# EAGLE board fira_nrf_3 (EAGLE 9.1.3)
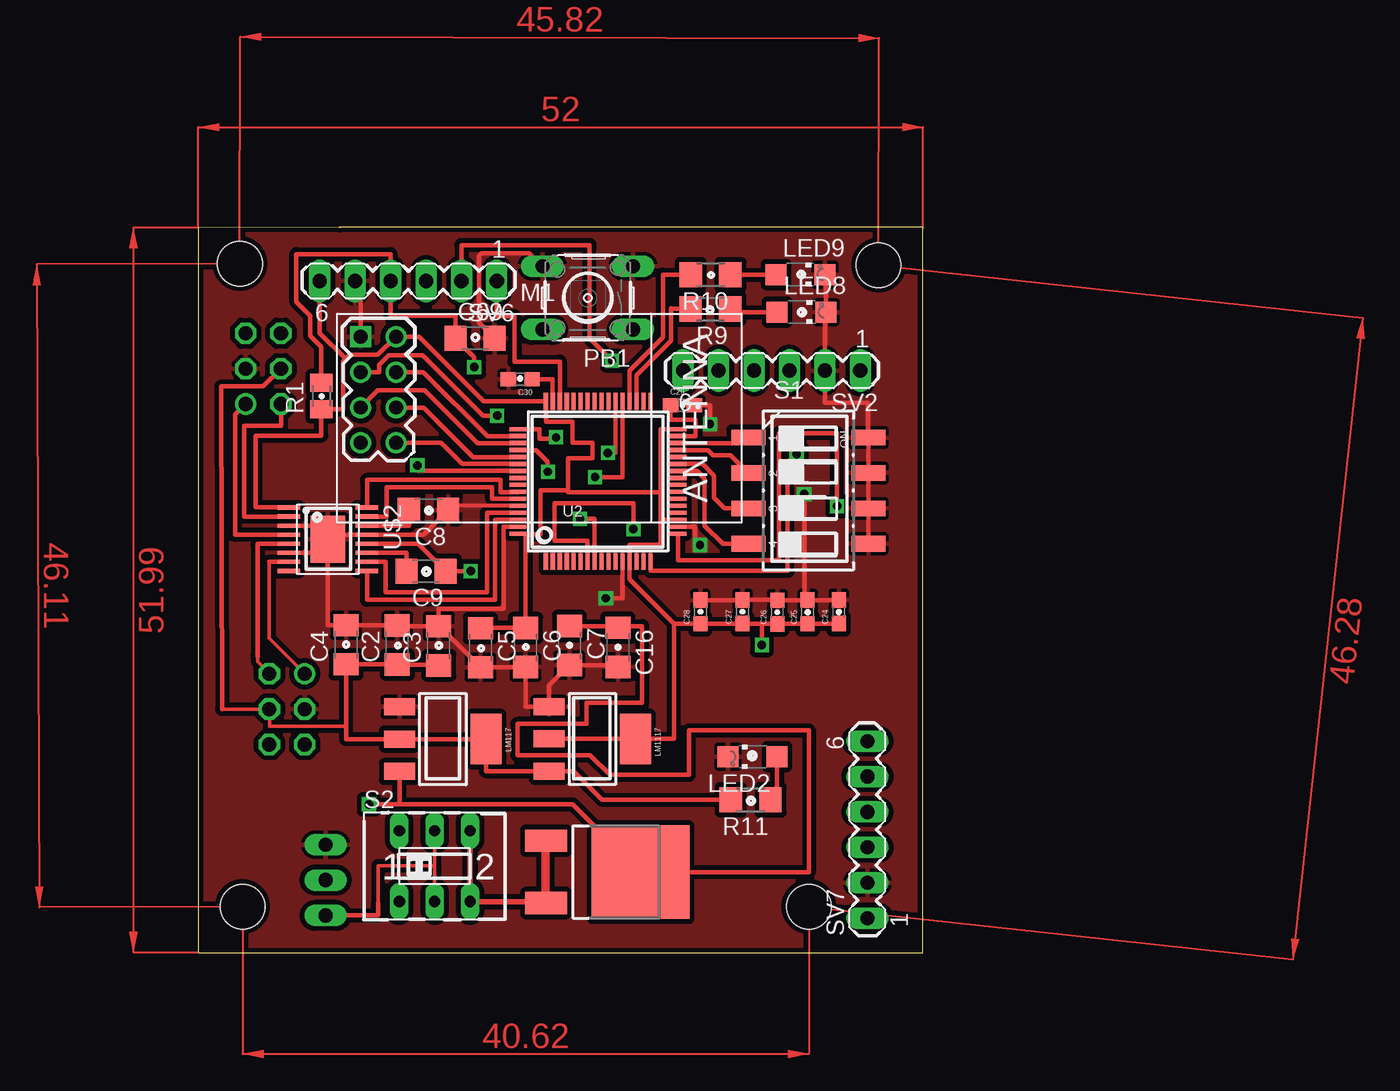
[diagram p0: board, top side]
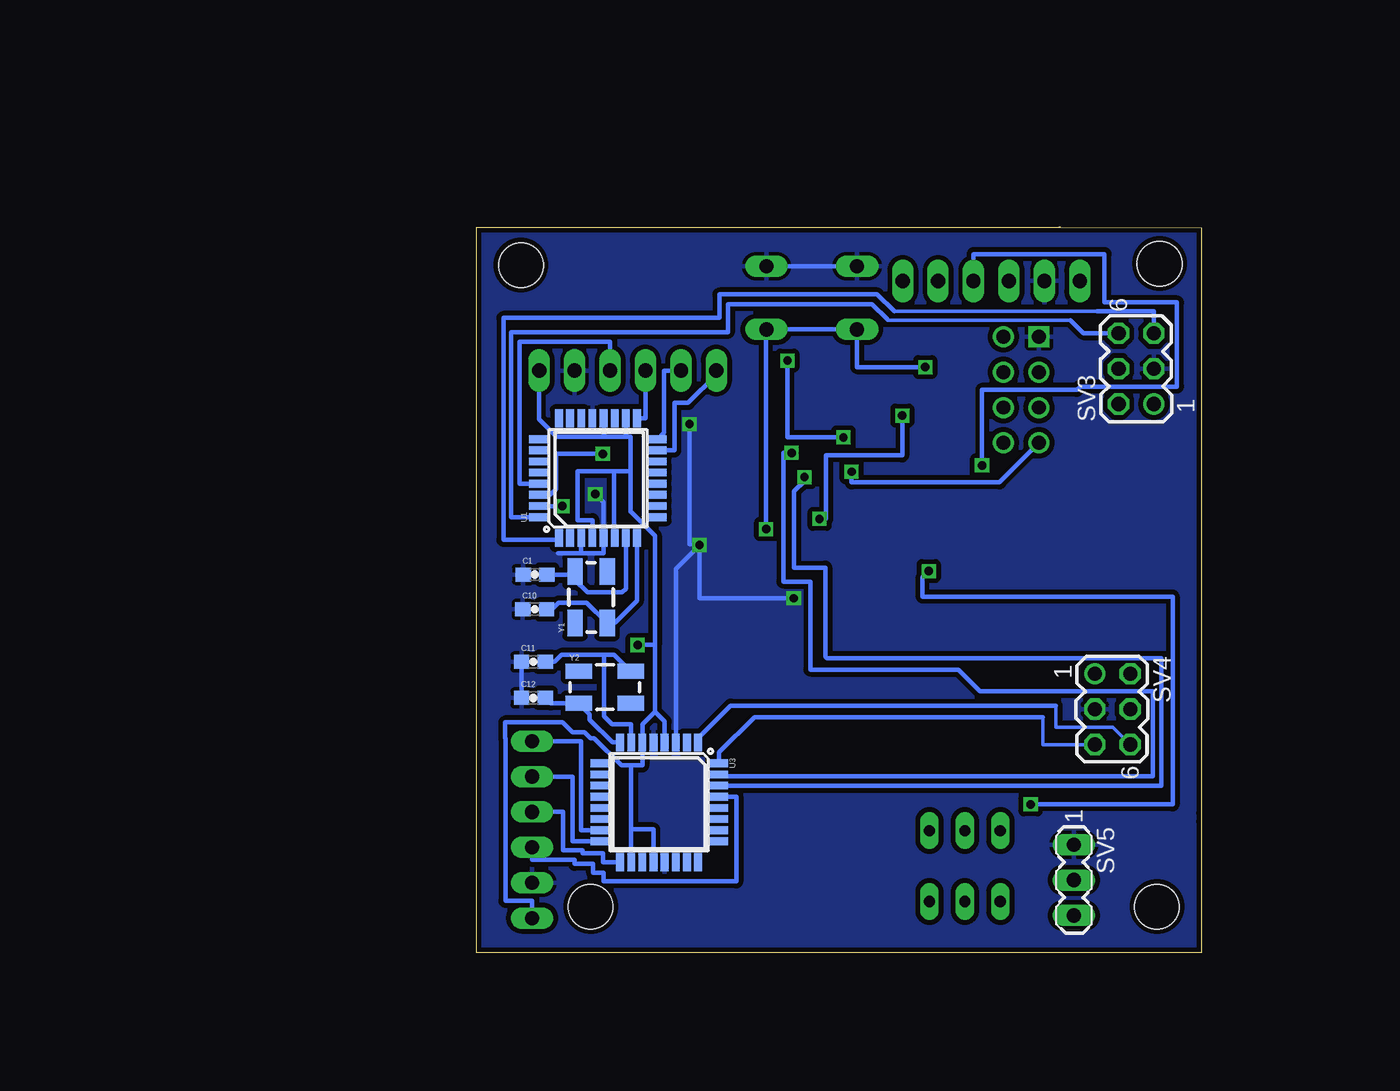
[diagram p1: board, bottom side, seen from below]

Size 52 x 52 mm. Coordinates in mm from the lower left corner, seen from the top.
Outline: 0,0 51.99,0 52,51.61 52,52 10.1,52 10.2,52 0,51.99 0,10 0,9.4 0,0
Copper layers (1*16): Top 0.035mm / dielectric 1.5mm / Bottom 0.035mm
Design rules "default *": minimum track width 10mil, minimum drill 24mil, track to track 7mil, track to pad 7mil, pad to pad 7mil, via to via 7mil, smd to smd 7mil, copper to edge 7mil, drill to drill 7mil, minimum pad ring 10mil, minimum via ring 8mil, stop-mask expansion 0mil, vias tented up to drill 0mil, thermal gap 10mil
Holes 3.2 mm at 43.8,3.29 3.18,3.29 2.99,49.4 48.81,49.3

## Footprints (pad centres in the part's own frame; a part is rotated, then mirrored left to right if it is on the bottom)
0603-CAP = smd 1.1 x 1: 1 -0.85,0; 2 0.85,0
C1206 = smd 1.6 x 1.8: 1 -1.4,0; 2 1.4,0
CHIPLED_1206 = smd 1.5 x 1.5: A 0,-1.75; C 0,1.75
SOT223 = smd 1.219 x 2.235: 1 -2.311,-3.099; 2 0,-3.099; 3 2.311,-3.099 | smd 3.6 x 2.2: 4 0,3.099
WIRELESS-NRF24L01 = drill 1 square: 1 -12.7,6.35 | drill 1: 2 -10.16,6.35; 3 -12.7,3.81; 4 -10.16,3.81; 5 -12.7,1.27; 6 -10.16,1.27; 7 -12.7,-1.27; 8 -10.16,-1.27
B3F-10XX = drill 1.016 long: 1 -3.251,2.261; 2 3.251,2.261; 3 -3.251,-2.261; 4 3.251,-2.261
M0805 = smd 1.3 x 1.6: 1 -0.95,0; 2 0.95,0
R1206 = smd 1.6 x 1.803: 1 -1.422,0; 2 1.422,0
CTS-219-04 = smd 1.13 x 2.44: 1 -3.81,-4.3; 2 -1.27,-4.3; 3 1.27,-4.3; 4 3.81,-4.3; 5 3.81,4.3; 6 1.27,4.3; 7 -1.27,4.3; 8 -3.81,4.3
A68-A31 = drill 0.813 long: 1 -2.54,-2.54; 2 0,-2.54; 3 2.54,-2.54; 4 -2.54,2.54; 5 0,2.54; 6 2.54,2.54
MA06-1 = drill 1.016 long: 1 -6.35,0; 2 -3.81,0; 3 -1.27,0; 4 1.27,0; 5 3.81,0; 6 6.35,0
MA03-2 = drill 1.016: 1 -2.54,-1.27 | drill 1.016 octagon: 2 -2.54,1.27; 3 0,-1.27; 4 0,1.27; 5 2.54,-1.27; 6 2.54,1.27
MA03-1 = drill 1.016 long: 1 -2.54,0; 2 0,0; 3 2.54,0
TQFP32-08 = smd 1.27 x 0.559: 1 -4.293,2.8; 2 -4.293,2; 3 -4.293,1.2; 4 -4.293,0.4; 5 -4.293,-0.4; 6 -4.293,-1.2; 7 -4.293,-2; 8 -4.293,-2.8; 17 4.293,-2.8; 18 4.293,-2; 19 4.293,-1.2; 20 4.293,-0.4; 21 4.293,0.4; 22 4.293,1.2; 23 4.293,2; 24 4.293,2.8 | smd 0.559 x 1.27: 9 -2.8,-4.293; 10 -2,-4.293; 11 -1.2,-4.293; 12 -0.4,-4.293; 13 0.4,-4.293; 14 1.2,-4.293; 15 2,-4.293; 16 2.8,-4.293; 25 2.8,4.293; 26 2,4.293; 27 1.2,4.293; 28 0.4,4.293; 29 -0.4,4.293; 30 -1.2,4.293; 31 -2,4.293; 32 -2.8,4.293
LQFP64 = smd 0.3 x 1.2: 1 -3.75,-5.75; 2 -3.25,-5.75; 3 -2.75,-5.75; 4 -2.25,-5.75; 5 -1.75,-5.75; 6 -1.25,-5.75; 7 -0.75,-5.75; 8 -0.25,-5.75; 9 0.25,-5.75; 10 0.75,-5.75; 11 1.25,-5.75; 12 1.75,-5.75; 13 2.25,-5.75; 14 2.75,-5.75; 15 3.25,-5.75; 16 3.75,-5.75; 33 3.75,5.75; 34 3.25,5.75; 35 2.75,5.75; 36 2.25,5.75; 37 1.75,5.75; 38 1.25,5.75; 39 0.75,5.75; 40 0.25,5.75; 41 -0.25,5.75; 42 -0.75,5.75; 43 -1.25,5.75; 44 -1.75,5.75; 45 -2.25,5.75; 46 -2.75,5.75; 47 -3.25,5.75; 48 -3.75,5.75 | smd 1.2 x 0.3: 17 5.75,-3.75; 18 5.75,-3.25; 19 5.75,-2.75; 20 5.75,-2.25; 21 5.75,-1.75; 22 5.75,-1.25; 23 5.75,-0.75; 24 5.75,-0.25; 25 5.75,0.25; 26 5.75,0.75; 27 5.75,1.25; 28 5.75,1.75; 29 5.75,2.25; 30 5.75,2.75; 31 5.75,3.25; 32 5.75,3.75; 49 -5.75,3.75; 50 -5.75,3.25; 51 -5.75,2.75; 52 -5.75,2.25; 53 -5.75,1.75; 54 -5.75,1.25; 55 -5.75,0.75; 56 -5.75,0.25; 57 -5.75,-0.25; 58 -5.75,-0.75; 59 -5.75,-1.25; 60 -5.75,-1.75; 61 -5.75,-2.25; 62 -5.75,-2.75; 63 -5.75,-3.25; 64 -5.75,-3.75
PWP_R_PDSO_G16 = smd 0.3 x 1.6: 1 -2.275,-2.8; 2 -1.625,-2.8; 3 -0.975,-2.8; 4 -0.325,-2.8; 5 0.325,-2.8; 6 0.975,-2.8; 7 1.625,-2.8; 8 2.275,-2.8; 9 2.275,2.8; 10 1.625,2.8; 11 0.975,2.8; 12 0.325,2.8; 13 -0.325,2.8; 14 -0.975,2.8; 15 -1.625,2.8; 16 -2.275,2.8 | smd 3.4 x 2.46: PWRPAD 0,0
DPAK = smd 1.6 x 2.997: 1 -2.261,-4.928; 3 2.21,-4.928 | smd 6.7 x 7: 2 0,1.853
CRYSTAL-SMD-5X3 = smd 1.9 x 1.1: 1 -1.85,-1.15; 2 1.85,-1.15; 3 1.85,1.15; 4 -1.85,1.15

## Placement (x,y rotation side)
C1  [0603-CAP]  47.79,27.1 0 bottom
C2  47uf  [C1206]  14.27,22.05 90 top
C3  0.1uf  [C1206]  17.25,21.99 90 top
C4  47uf  [C1206]  10.6,22.07 90 top
C5  47uf  [C1206]  20.24,21.86 270 top
C6  0.1uf  [C1206]  23.48,21.88 270 top
C7  10uf  [C1206]  26.63,22.01 270 top
C8  2.2uf  [C1206]  16.52,31.73 180 top
C9  0.01uf  [C1206]  16.34,27.35 180 top
C10  [0603-CAP]  47.82,24.61 0 bottom
C11  [0603-CAP]  47.91,20.85 0 bottom
C12  [0603-CAP]  47.91,18.26 0 bottom
C16  47uf  [C1206]  30.11,21.89 270 top
C24  100n  [0603-CAP]  45.95,24.44 90 top
C25  100n  [0603-CAP]  43.72,24.42 90 top
C26  100n  [0603-CAP]  41.54,24.42 90 top
C27  100n  [0603-CAP]  39.04,24.44 90 top
C28  100n  [0603-CAP]  36.02,24.43 90 top
C29  2u2  [0603-CAP]  34.74,39.23 0 top
C30  2u2  [0603-CAP]  23.1,41.12 180 top
C69  0.1uf  [C1206]  19.86,44.04 0 top
LED2  [CHIPLED_1206]  39.76,14.04 90 top
LED8  [CHIPLED_1206]  43.28,45.92 270 top
LED9  [CHIPLED_1206]  43.2,48.62 270 top
LM117  5v  [SOT223]  17.55,15.31 270 top
LM1117  3.3  [SOT223]  28.27,15.31 270 top
M1  WIRELESS-NRF24L01  [WIRELESS-NRF24L01]  24.35,37.81 0 top
PB1  [B3F-10XX]  27.94,46.94 180 top
R1  [M0805]  8.83,39.9 90 top
R9  [R1206]  36.74,46.15 180 top
R10  [R1206]  36.75,48.61 180 top
R11  [R1206]  39.63,10.96 180 top
S1  219-04  [CTS-219-04]  43.77,33.12 270 top
S2  [A68-A31]  16.96,6.2 0 top
SV2  [MA06-1]  41.14,41.73 180 top
SV3  [MA03-2]  4.67,41.87 90 bottom
SV4  [MA03-2]  6.37,17.46 270 bottom
SV5  [MA03-1]  9.14,5.2 270 bottom
SV6  [MA06-1]  15.07,48.16 180 top
SV7  [MA06-1]  48,8.81 90 top
U1  ATMEGA328P_TQFP  [TQFP32-08]  43.28,34.02 90 bottom
U2  STM32F405RGT  [LQFP64]  28.68,33.78 0 top
U3  ATMEGA328P_TQFP  [TQFP32-08]  38.89,10.77 270 bottom
U$2  DRV8833  [PWP_R_PDSO_G16]  9.3,29.64 270 top
VD1  [DPAK]  29.88,5.76 270 top
Y1  [CRYSTAL-SMD-5X3]  43.77,25.48 90 bottom
Y2  [CRYSTAL-SMD-5X3]  42.79,19.02 0 bottom

## Library data of the parts
C1 C10-C12 = SparkFun-Passives
C2-C9 C16 C69 = rcl
C24-C30 U2 = stm32f4stamp
LED2 LED8 LED9 = led
LM117 LM1117 = SparkFun
M1 = diy-modules
PB1 = switch-omron; MPN: B3F-1000; OC_FARNELL: 176432; OC_NEWARK: 36M3542
R1 R9-R11 = resistor
S1 = switch-dil; OC_FARNELL: unknown; OC_NEWARK: unknown
S2 = switch
SV2-SV7 = con-lstb; OC_FARNELL: unknown; OC_NEWARK: unknown
U1 U3 = SparkFun-DigitalIC; PROD_ID: IC-09069
U$2 = drv8833
VD1 = IDD06SG60C
Y1 Y2 = SparkFun-FreqCtrl; PROD_ID: XTAL-08218

## Nets
3.3V: C5.1 C6.1 C24.1 C25.1 C26.1 C27.1 C28.1 LM1117.2 LM1117.4 M1.2 R1.1 SV2.1 SV6.6 SV7.1 U1.4 U1.6 U1.18 U1.20 U2.13 U2.19 U2.32 U2.48 U2.64 U3.4 U3.6 U3.18 U3.20 U$2.1
+5V: C2.1 C3.1 C4.1 LM117.2 LM117.4 LM1117.3 R11.2 SV3.4 SV4.4
BATT_LEVEL: S2.3 S2.6 VD1.3
BOT_COLOR: S1.1 U2.30
CE: M1.3 U2.8
CSN: M1.4 U2.50
ENCA1: SV3.6 U1.32
ENCA2: SV3.5 U1.1
ENCB1: SV4.5 U3.32
ENCB2: SV4.6 U3.1
GND: C1.1 C2.2 C3.2 C4.2 C5.2 C6.2 C7.2 C8.1 C10.1 C11.1 C12.1 C16.2 C24.2 C25.2 C26.2 C27.2 C28.2 C29.2 C30.2 C69.2 LED2.C LED8.C LED9.C LM117.1 LM1117.1 M1.1 PB1.3 PB1.4 S1.5 S1.6 S1.7 S1.8 SV2.2 SV3.3 SV4.3 SV5.1 SV6.5 SV7.2 U1.3 U1.5 U1.21 U2.12 U2.18 U2.60 U2.63 U3.3 U3.5 U3.21 U$2.3 U$2.6 U$2.13 U$2.PWRPAD
ID_0: S1.2 U2.29
ID_1: S1.3 U2.27
ID_2: S1.4 U2.26
IRQ: M1.8 U2.54
MISO: M1.7 U2.52
MISO_1: SV2.5 U1.16
MISO_2: SV7.5 U3.16
MOSI: M1.6 U2.53
MOSI_1: SV2.6 U1.15
MOSI_2: SV7.6 U3.15
N$1: LED2.A R11.1
N$2: LED9.A R10.1
N$5: C11.2 U3.7 Y2.3
N$7: C8.2 U$2.14
N$9: LED8.A R9.1
N$10: S2.2 S2.5 SV5.3
N$11: C9.2 U$2.11
N$12: C12.2 U3.8 Y2.1
N$13: C29.1 U2.31
N$14: C30.1 U2.47
N$15: C1.2 U1.7 Y1.3
N$16: C10.2 U1.8 Y1.1
N$28: U2.6
N$29: U2.5
N$30: U2.28
NRST: C69.1 PB1.1 PB1.2 R1.2 SV6.4 U2.7
OUTA1: SV3.2 U$2.2
OUTA2: SV3.1 U$2.4
OUTB1: SV4.1 U$2.7
OUTB2: SV4.2 U$2.5
PA0: U2.14
PA1: U2.15
PA4: U2.20
PA5: U2.21
PA6: U2.22
PA7: U2.23
PA8: U2.41
PA10: U2.43
PB4: U2.56
PB5: U2.57
PB12: U2.33
PB13: U2.34
PB14: R9.2 U2.35
PB15: R10.2 U2.36
PC1: U2.9
PC2: U2.10
PC3: U2.11
PC4: U2.24
PC5: U2.25
PC8: U2.39
PC9: U2.40
PC13: U2.2
PC14: U2.3
PC15: U2.4
PWMA1: U2.58 U$2.16
PWMA2: U2.59 U$2.15
PWMB1: U2.61 U$2.10
PWMB2: U2.62 U$2.9
RST_1: SV2.3 U1.29
RST_2: SV7.3 U3.29
RXA: U1.30 U2.16
RXB: U2.37 U3.30
SCK: M1.5 U2.51
SCK_1: SV2.4 U1.17
SCK_2: SV7.4 U3.17
SWCLK: SV6.2 U2.49
SWDIO: SV6.1 U2.46
TRACESWO: SV6.3 U2.55
TXA: U1.31 U2.17
TXB: U2.38 U3.31
USB_DM: U2.44
USB_DP: U2.45
VBAT: U2.1
VBUS: U2.42
VCC: C7.1 C9.1 C16.1 LM117.3 U$2.12 VD1.2

## Tracks (layer width: path | path; a pad name or v marks a point on that pad's centre or on a via)
3.3V  (via drill 0.6)
  Top 0.305: 40.43,23.59 C27.1 39.03,23.58 C28.1 34.11,23.59 | 40.43,23.59 41.52,23.59 C26.1 C25.1 45.94,23.57 C24.1 | v40.43,22.05 40.43,23.59 | LM1117.2 LM1117.4 34.11,15.31 34.11,23.59 | C5.1 20.24,23.28 C6.1 23.48,30.03 | U2.32 33.16,37.53 33.16,33 | 33.16,33 33.16,31.03 | 33.16,31.03 U2.19 | U2.64 23.48,30.03 | 34.11,23.59 30.93,26.77 U2.13 30.93,29.24 33.16,29.24 33.16,31.03 | 26.55,33.14 26.55,35.43 28.27,35.43 28.27,36.55 26.87,36.55 26.87,38.04 24.93,38.04 U2.48 20.47,39.53 15.84,44.16 M1.2 12.88,42.86 10.86,42.86 10.57,42.56 | 23.48,30.03 23.52,29.99 24.55,29.99 24.55,33.14 26.55,33.14 | 10.57,42.56 10.39,42.39 10.39,38.95 R1.1 8.83,37.07 4.11,37.07 4.11,31.91 U$2.1 | 10.57,42.56 8.72,44.42 SV6.6 | 33.16,33 26.55,33 26.55,33.14
  Bottom 0.305: SV7.1 48,3.7 | 39.19,17.27 40.09,16.36 U3.6 40.09,13.43 40.89,13.43 | 39.19,17.27 39.19,22.05 | 39.19,22.05 v40.43,22.05 | 48,3.7 49.92,3.7 49.92,15.35 49.93,15.35 49.93,16.5 45.81,16.5 45.11,15.79 44.25,15.79 43.83,15.37 43.55,15.37 41.6,13.43 40.89,13.43 | 48,3.7 48,3.72 | SV2.1 47.49,38.23 46.26,37 42.84,37 | 42.84,37 41.28,37 | 40.94,34.53 40.94,37 41.28,37 | 39.19,22.05 39.19,29.9 40.91,31.62 40.94,31.62 40.94,34.53 | 40.94,34.53 42.13,34.53 | 42.13,34.53 44.73,34.53 44.73,31.01 43.68,31.01 U1.4 | 41.28,37 U1.18 | 40.89,13.43 40.89,8.83 | 40.89,8.83 U3.18 | U1.20 42.84,38.31 42.84,37 | U1.6 42.13,29.72 42.13,34.53 | U3.4 38.49,16.57 39.19,17.27 | U3.20 39.29,8.83 40.89,8.83
+5V
  Top 0.254: 1.71,17.46 SV4.4 5.11,16.21 10.6,16.21 10.6,15.31
  Top 0.305: C3.1 17.25,20.65 C2.1 14.27,20.67 C4.1 10.6,15.31 LM117.2 LM117.4 20.65,13 LM1117.3 26.91,13 28.95,10.96 R11.2 | 1.71,17.46 1.65,40.6 4.66,40.6 SV3.4
BATT_LEVEL
  Top 0.406: VD1.3 24.95,3.66 S2.3 S2.6
BOT_COLOR
  Top 0.305: 39.46,36.94 S1.1 39.47,36.53 U2.30
CE  (via drill 0.6)
  Top 0.305: M1.3 12.97,41.62 12.97,42.14 13.67,42.84 16.09,42.84 20.42,38.5 v21.45,38.5 | v27.39,31.1 28.43,31.1 U2.8
  Bottom 0.305: v21.45,38.5 21.45,35.65 26.91,35.65 26.91,31.1 v27.39,31.1
CSN
  Top 0.305: M1.4 16.14,41.62 20.74,37.02 22.92,37.02 U2.50
ENCA1
  Bottom 0.254: 22.53,45.41 22.53,45.35 9.39,45.35
  Bottom 0.305: 22.53,45.41 23.62,46.5 33.97,46.5 33.97,44.49 49.5,44.49 49.5,31.22 U1.32 | 9.39,45.35 8.45,44.41 SV3.6
ENCA2
  Bottom 0.254: 22.03,45.97 7.5,45.97
  Bottom 0.305: 46.08,29.67 U1.1 46.08,29.59 50.05,29.59 50.05,45.52 34.57,45.52 34.57,47.19 23.25,47.19 22.03,45.97 | 7.5,45.97 3.4,45.97 SV3.5
ENCB1
  Bottom 0.254: 11.37,16.88 11.37,14.92 SV4.5
  Bottom 0.305: U3.32 34.6,14.35 32.07,16.88 11.37,16.88
ENCB2
  Bottom 0.254: 10.43,17.71 10.43,16.16 6.34,16.16 SV4.6
  Bottom 0.305: U3.1 36.09,15.37 33.76,17.71 10.43,17.71
GND  (via drill 0.6)
  Top 0.3: U2.60 18.23,32.03 C8.1
  Top 0.305: U$2.PWRPAD 9.3,29.96 U$2.13 16.16,29.96 C8.1 | C28.2 39.03,25.28 C27.2 41.52,25.29 C26.2 C25.2 | C25.2 45.94,25.27 C24.2 | 44.95,46.01 LED8.C | C16.2 30.11,20.61 C7.2 25.17,19.16 LM1117.1 23.48,17.62 C6.2 23.46,20.45 C5.2 17.3,23.39 C3.2 | S1.5 S1.6 S1.7 S1.8 48.05,36.93 48.05,39.43 44.95,39.43 SV2.2 44.95,45.85 LED8.C | U$2.6 9.3,28.66 U$2.PWRPAD | U$2.3 9.3,30.61 U$2.PWRPAD | U$2.PWRPAD 9.3,23.47 C4.2 14.27,23.47 C2.2 14.27,23.39 C3.2 | U2.63 21.89,30.53 21.89,24.66 17.25,24.66 C3.2 | U2.18 35.65,30.53 35.65,29.63 v36,29.22 | v29.24,25.4 30.43,25.4 U2.12 | C29.2 36.71,39.23 v36.71,37.89 | M1.1 11.65,47.77 SV6.5 | LED9.C 45.03,48.53 LED8.C | v43.47,32.88 43.47,25.52 C25.2 | PB1.4 23.74,50.16 20.34,50.16 20.15,49.96 20.15,45.15 C69.2
  Bottom 0.305: C11.1 C12.1 | C12.1 | 11.63,44.18 M1.1 | v29.24,25.4 36,25.4 v36,29.22 | v36.71,37.89 36.71,29.3 36.7,29.28 v36,29.22 | v43.47,32.88 42.88,32.29 U1.5 42.88,28.65 44.48,28.65 | PB1.4 PB1.3 | U1.3 44.48,28.65 | 44.48,28.65 46.13,28.65 | U3.3 37.69,27.52 v36,29.22
  pour Top (isolate 0.356): 0.01,51.98 52,51.98 52,-0.04 0.02,-0.04
  pour Bottom (isolate 0.356): 0.02,51.98 0.02,0 51.99,0 51.99,51.99 0.02,51.99
ID_0
  Top 0.305: U2.29 36.55,36.03 36.93,35.66 38.2,35.66 S1.2
ID_1
  Top 0.305: U2.27 36.16,35.03 36.99,34.2 36.99,32.61 37.75,31.86 39.46,31.86 S1.3
ID_2
  Top 0.305: U2.26 35.78,34.53 36.33,33.98 36.33,30.62 37.63,29.32 39.46,29.32 S1.4
IRQ
  Top 0.305: M1.8 17.43,36.54 18.94,35.03 U2.54 | U2.54
MISO  (via drill 0.6)
  Top 0.305: U2.52 24.22,36.03 25.07,35.18 v25.08,34.47
  Bottom 0.305: M1.7 14.47,33.72 25.08,33.72 v25.08,34.47
MISO_1
  Bottom 0.305: 39.04,36.82 U1.16 38.55,37.26 38.55,41.73 SV2.5
MISO_2
  Bottom 0.305: SV7.5 45.09,12.62 45.09,7.97 U3.16
MOSI
  Top 0.305: M1.6 16.16,39.08 19.71,35.53 U2.53
MOSI_1
  Bottom 0.305: U1.15 37.8,36.02 37.8,39.41 36.8,39.41 34.79,41.42 SV2.6
MOSI_2
  Bottom 0.305: SV7.6 44.48,15.16 44.48,8.77 U3.15
N$1
  Top 0.305: LED2.A 41.51,10.96 R11.1
N$2
  Top 0.305: LED9.A R10.1
N$3
  Top 0.61: 24.94,8.03 24.92,8.03 24.92,3.79
N$5
  Bottom 0.305: Y2.3 42.11,21.34 42.85,21.34 | 42.85,21.34 45.89,21.34 46.38,20.85 C11.2 | U3.7 40.89,16.37 42.26,16.37 42.85,16.96 42.85,21.34
N$7
  Top 0.305: U$2.14 15.12,30.61 C8.2
N$9
  Top 0.305: 41.3,46.15 LED8.A 38.39,45.92 R9.1
N$10
  Top 0.254: 16.96,6.24 12.92,6.24 12.92,3.59 | 16.96,6.24 S2.5 | 16.96,6.24 S2.2
  Top 0.305: SV5.3 12.92,2.66 12.92,3.59
N$11
  Top 0.305: U$2.11 14.94,28.66 C9.2
N$12
  Bottom 0.305: C12.2 46.66,17.87 Y2.1 43.87,17.1 43.87,16.69 42.25,15.06 U3.8
N$13
  Top 0.305: C29.1 33.89,38.22 35.68,38.22 35.68,37.03 U2.31
N$14
  Top 0.305: C30.1 25.43,41.12 U2.47
N$15
  Bottom 0.305: U1.7 41.28,26.07 41.54,25.82 44.03,25.82 44.92,26.71 Y1.3 | 44.93,26.52 Y1.3 | Y1.3 45.15,27.1 C1.2
N$16
  Bottom 0.305: U1.8 40.48,25.21 42.05,23.63 Y1.1 44.08,25.09 46.1,25.09 46.58,24.61 C10.2
NRST  (via drill 0.6)
  Top 0.305: v19.8,41.98 19.8,42.7 C69.1 18.45,44.04 18.45,45.65 13.8,45.65 SV6.4 13.8,50.09 7.04,50.09 7.04,46.67 8.04,45.67 8.04,44.22 8.83,43.43 R1.2 | U2.7 27.93,29.53 25.55,29.53 25.55,32.22 31.22,32.22 v31.22,30.36
  Bottom 0.305: v31.22,30.36 31.22,44.68 PB1.1 PB1.2 24.69,41.98 v19.8,41.98
OUTA1
  Top 0.305: U$2.2 3.28,31.26 3.28,37.78 5.93,37.78 SV3.2
OUTA2
  Top 0.305: U$2.4 2.66,29.96 2.66,38.59 SV3.1
OUTB1
  Top 0.254: 5.1,28.01 5.1,22.54 SV4.1
  Top 0.305: U$2.7 5.1,28.01
OUTB2
  Top 0.254: 4.25,21.22 4.25,20.84 SV4.2
  Top 0.305: U$2.5 4.26,29.31 4.26,21.22 4.25,21.22
PB14
  Top 0.305: U2.35 31.43,40.9 31.44,40.9 31.44,41.4 33.91,43.87 33.91,46.2 33.96,46.15 R9.2
PB15
  Top 0.305: U2.36 30.93,41.71 33.33,44.1 33.33,48.61 R10.2
PWMA1
  Top 0.305: U2.58 21.69,33.02 21.69,33.89 12.1,33.89 U$2.16
PWMA2
  Top 0.305: U2.59 21.09,32.53 21.09,33.36 13.52,33.36 13.52,31.26 U$2.15
PWMB1
  Top 0.305: U2.61 20.71,31.53 20.71,25.83 13.43,25.83 13.43,28.01 U$2.10
PWMB2
  Top 0.305: U2.62 21.31,31.03 21.31,25.28 12.1,25.28 U$2.9
RST_1
  Bottom 0.305: SV2.3 42.41,43.79 48.9,43.79 48.9,33.62 U1.29 47.57,33.59
RST_2
  Bottom 0.305: U3.29 33.35,11.17 33.35,5.11 42.89,5.11 42.89,5.71 43.62,5.71 43.62,6.36 44.95,6.36 44.95,6.64 48,6.64 SV7.3
RXA  (via drill 0.6)
  Top 0.305: U2.16 32.43,27.36 42.29,27.36 42.29,35.11 v42.93,35.75
  Bottom 0.305: U1.30 46.7,32.82 46.28,33.23 46.28,35.75 v42.93,35.75
RXB  (via drill 0.6)
  Top 0.305: v28.46,34.09 30.43,34.09 U2.37
  Bottom 0.305: U3.30 2.86,11.97 2.86,21.1 26.85,21.1 26.96,21.21 26.96,27.61 29.2,27.61 29.2,33.06 28.46,33.8 v28.46,34.09
SCK
  Top 0.305: M1.5 12.88,40.31 16.25,40.31 20.03,36.53 U2.51
SCK_1
  Bottom 0.305: SV2.4 39.87,38.31 39.91,38.31 U1.17
SCK_2
  Bottom 0.305: SV7.4 45.8,10.08 45.8,7.34 44.37,7.34 44.37,7.1 42.92,7.1 42.92,6.48 U3.17
SWCLK  (via drill 0.6)
  Top 0.305: U2.49 24.47,37.53 24.47,36.84 25.57,36.84 v25.67,36.94 | SV6.2 18.88,50.73 28.07,50.73 28.07,44.06 v29.69,42.45
  Bottom 0.305: v25.67,36.94 29.69,36.94 v29.69,42.45
SWDIO
  Top 0.305: U2.46 25.95,39.53 25.95,42.38 22.69,42.38 22.69,45.63 21.42,45.63 SV6.1
TRACESWO  (via drill 0.6)
  Top 0.305: v15.72,34.94 15.72,34.53 U2.55
  Bottom 0.305: 15.67,34.94 v15.72,34.94 15.72,40.34 8.93,40.34 8.69,40.59 1.75,40.59 1.75,46.62 6.95,46.62 6.95,50.09 16.34,50.09 SV6.3
TXA  (via drill 0.6)
  Top 0.305: v45.83,32.02 45.83,37.24 41.64,37.24 41.64,28.11 34.43,28.11 U2.17
  Bottom 0.305: U1.31 v45.83,32.02 arc90 v45.83,32.02
TXB  (via drill 0.6)
  Top 0.305: v29.39,35.83 29.93,35.83 U2.38
  Bottom 0.305: U3.31 34.48,12.64 3.47,12.64 3.47,18.74 15.88,18.74 17.42,20.28 28.05,20.28 28.05,26.6 29.99,26.6 29.99,35.83 v29.39,35.83
VCC  (via drill 0.6)
  Top 0.305: C16.1 30.11,23.41 C7.1 31.84,23.41 31.84,17.91 27.84,17.91 27.84,16.39 22.9,16.39 22.9,14.15 28.11,14.15 29.52,12.73 35.19,12.73 | U$2.12 15.78,29.31 C9.1 v19.55,27.35 | v12.24,10.63 14.45,10.63 LM117.3 | v12.24,10.63 26.86,10.63 VD1.2 43.8,5.76 43.8,15.93 35.19,15.93 35.19,12.73 | 35.19,12.73 35.19,15.93
  Bottom 0.305: 2.05,25.51 20,25.51 20,26.9 v19.55,27.35 | 2.05,25.51 2.05,10.63 | 2.05,10.63 v12.24,10.63 | 2.05,25.51 2.05,10.63
(copper drawn outside any net)
  shapes: Top area x6